# Altium PCB EP600_K_V1.2.3.PcbDoc
Units mm, origin at the board's own origin, x right, y up, seen from the top; angles counter-clockwise.
Board outline 130 x 24 mm, 2 copper layers (Top Layer, Bottom Layer); 22 components, 21 nets, 56 pads, 8 vias.
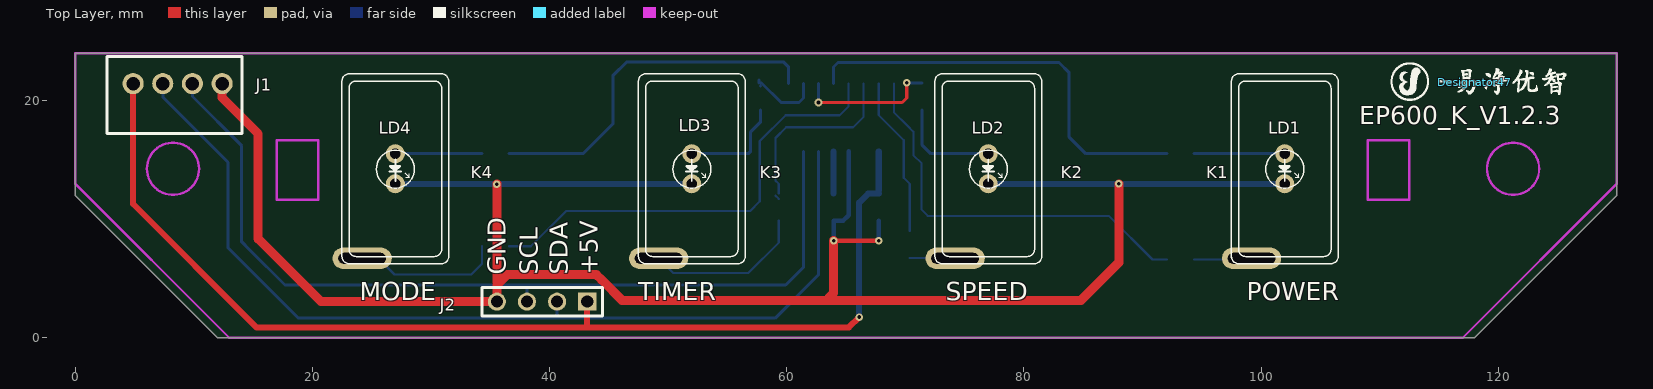
[diagram p0: Top Layer view]
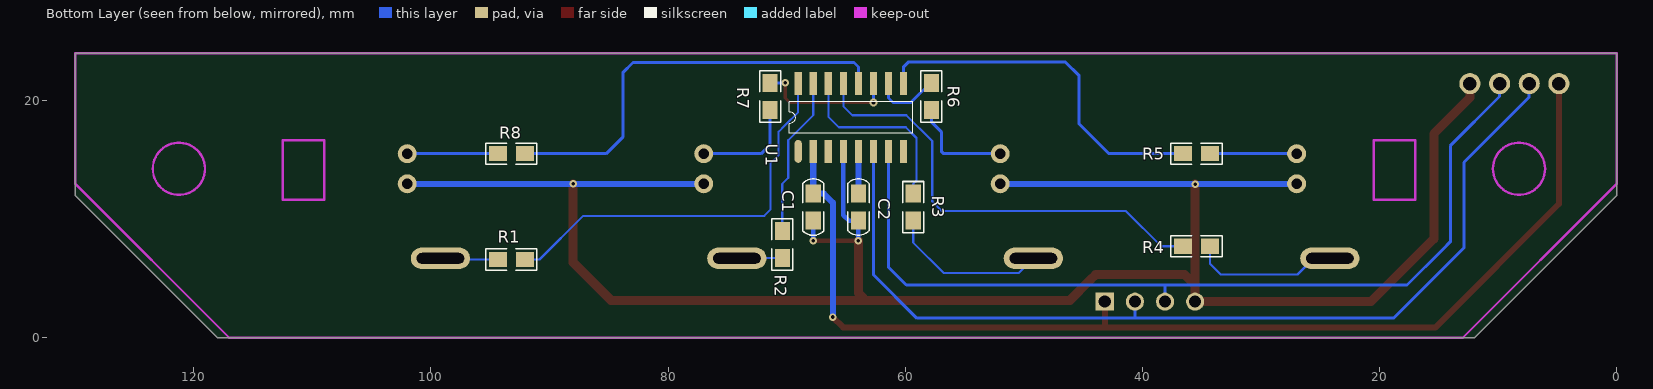
[diagram p1: Bottom Layer view, seen from below]

## Layer stack, top to bottom
Top Layer: signal copper 0.0356
Dielectric: dielectric 0.32, FR-4, Dk 4.8
Bottom Layer: signal copper 0.0356

## Board outline
12,0 0,12 0,24 130,24 130,12 118,0

## Design rules (kind name [scope] priority, off if disabled: settings)
Clearance [All] p1: gap=0.203
ComponentClearance [All] p1: gap=0.254 collisioncheckmode=3 verticalgap=0.254
HoleSize [All] p1: absolutevalues=TRUE maxlimit=2.54 minlimit=0.203 maxpercent=80.000 minpercent=20.000
PolygonConnect [All] p1: connectstyle=Relief reliefconductorwidth=0.254 reliefentries=4 polygonreliefangle="90 Angle"
RoutingVias [All] p1: holewidth=0.711 width=2.54 viastyle="Through Hole" minholewidth=0.305 minwidth=0.635 maxholewidth=1.27 maxwidth=1.27
SolderMaskExpansion [All] p1: expansion=0.102
TestPointUsage [All] p1: valid=0 allowmultiple=FALSE
Testpoint [All] p1: side=15 testpointundercomponent=TRUE minsize=1.016 maxsize=2.54 preferedsize=1.524 minholesize=0 maxholesize=1.016 preferedholesize=0.813 testpointgrid=0.025 style=1023 order=0-112345678
Width [All] p1: maxlimit=2.54 minlimit=0.152 preferedwidth=0.254 minimp=50.000000 maximp=50.000000 favimp=50.000000
17 further rules are at their usual default settings.

## Components (designator, comment, footprint, x,y, rotation, side; value= is the part's Value field where it differs from the comment)
C1 "224" 0805_C 67.761,12.161 r270 bottom
C2 "104" 0805_C 63.951,9.875 r90 bottom
Designator47 "Comment" PIC_AIRFACTORY-1500 118.002,21.559 r0 top
J1 "CON4" YT2.54-4P 12.389,21.432 r0 top
J2 "CON4" SIP4 43.18,3.045 r180 top
K1 "KEY-1" KEY_1 102,14.25 r0 top locked
K2 "KEY-1" KEY_1 77,14.25 r0 top locked
K3 "KEY-1" KEY_1 52,14.25 r0 top locked
K4 "KEY-1" KEY_1 27,14.25 r0 top locked
LD1 "ON/OFF" LED1 102,14.25 r0 top locked
LD2 "SPEED" LED1 77,14.25 r0 top locked
LD3 "TIMER" LED1 52,14.25 r0 top locked
LD4 "MODE" LED1 27,14.25 r0 top locked
R1 "1K" 0805_R 94.361,6.601 r180 bottom
R2 "1K" 0805_R 70.371,6.728 r90 bottom
R3 "1K" 0805_R 59.328,9.875 r90 bottom
R4 "1K" 0805_R 34.309,7.716 r0 bottom
R5 "331" 0805_R 36.595,15.52 r180 bottom
R6 "331" 0805_R 57.804,21.489 r270 bottom
R7 "331" 0805_R 71.393,21.489 r270 bottom
R8 "331" 0805_R 92.075,15.52 r0 bottom
U1 "OB39A08T1" SOP16 69.031,15.717 r90 bottom

## Footprints (in the part's own frame and the unit in brackets; to place one, negate y for a bottom-side part, rotate by r counter-clockwise, add the part's x,y. Pads: shape width x height; smd on the part's side, far side on the other; paste and mask are expansions set on the pad)
0805_C [mil]
  rect 60x50 smd: 1(0,0) 2(90,0)
  silkscreen extent -48,-35 139,35
0805_R [mil]
  rect 60x50 smd: 1(0,0) 2(90,0)
  silkscreen extent -40,-35 130,35
KEY_1 [mm]
  oval 5x1.8 hole 0.9 slot 4 at 0 deg: 1(-2.8,-7.55)
  silkscreen extent -4.5,-8 4.5,8
LED1 [mil]
  round 63 hole 35.43: A(0,50) K(0,-50)
  silkscreen extent -63,-64 63,62
PIC_AIRFACTORY-1500 [mm]
  silkscreen extent -7.06,-1.52 7.75,1.65
SIP4 [mil]
  rect 60x60 hole 40: 1(0,0)
  round 60 hole 40: 2(100,0) 3(200,0) 4(300,0)
  silkscreen extent -50,-47 350,47
SOP16 [mil]
  oval 76x24 smd: 1(0,0)
  rect 76x24 smd: 2(0,-50) 3(0,-100) 4(0,-150) 5(0,-200) 6(0,-250) 7(0,-300) 8(0,-350) 9(225,-350) 10(225,-300) 11(225,-250) 12(225,-200) 13(225,-150) 14(225,-100) 15(225,-50) 16(225,0)
  silkscreen extent 60,-380 165,30
YT2.54-4P [mil]
  round 70 hole 45: 1(0,0) 2(-98.43,0) 3(-196.85,0) 4(-295.28,0)
  silkscreen extent -382,-165 67,91

## Part data
C1 C2: library part CAP, "CAP"
J1: library part CON6, "Connector"
LD1 LD2 LD3 LD4: library part LED, "LED"
R1 R2 R3 R4 R5 R6 R7 R8: library part R0.25W, "RESISTOR"

## Via types
v1: diameter 0.635, hole 0.305, Top Layer to Bottom Layer, tented both sides, 8 vias

## Nets (pads, with @x,y where several pads share a name; then routed paths per layer and width w, separated by ;. In a path a pad name is that pad's centre, name@x,y a point inside that pad or via, vN(x,y) a via of type N, cw(c..) or ccw(c..) an arc to the next point about the centre after c; other vN are vias at no path point)
+5V: C1.1 J1.4 J2.1 U1.2 | length 93
  Top Layer w0.508: J1.4 4.889,11.279 15.282,0.886 65.249,0.886 v1(66.11,1.747) ; 43.18,0.956 J2.1
  Bottom Layer w0.508: v1(66.11,1.747) 66.11,11.399 66.872,12.161 C1.1 ; C1.1@67.761,12.415 U1.2
GND: C1.2 C2.1 J1.1 J2.4 LD1.K LD2.K LD3.K LD4.K U1.4 | length 177.2
  Top Layer w0.381: v1(63.951,8.182) v1(67.761,8.182)
  Top Layer w0.762: J1.1 12.389,20.25 15.437,17.202 15.437,8.351 20.743,3.045 J2.4 v1(35.56,12.951) ; 35.56,4.442 36.449,5.331 43.942,5.331 44.389,4.884 46.129,3.144 84.808,3.144 88.011,6.347 v1(88.011,12.98) ; 63.57,3.398 63.951,3.779 v1(63.951,8.182)
  Bottom Layer w0.381: v1(63.951,8.182) C2.1 64.751,9.875 65.221,10.345 U1.4 ; v1(67.761,8.182) C1.2
  Bottom Layer w0.508: LD4.K LD3.K ; LD2.K LD1.K
NetC2_2: C2.2 U1.5 | length 3.6
  Bottom Layer w0.508: C2.2 U1.5
NetK1_1: K1.1 R1.1 | length 4.7
  Bottom Layer w0.178: R1.1 K1.1@99.073,6.601
NetK2_1: K2.1 R2.1 | length 4.9
  Bottom Layer w0.178: R2.1 73.8,6.728 73.828,6.7 K2.1 K2.1@74.934,5.966
NetK3_1: K3.1 R3.1 | length 13.6
  Bottom Layer w0.178: K3.1 50.442,5.458 56.759,5.458 59.328,8.027 R3.1
NetK4_1: K4.1 R4.1 | length 12.5
  Bottom Layer w0.178: K4.1 25.555,6.7 26.924,5.331 33.401,5.331 34.309,6.239 R4.1
NetLD1_A: LD1.A R8.2 | length 7.6
  Bottom Layer w0.254: R8.2 LD1.A
NetLD2_A: LD2.A R7.2 | length 8.8
  Bottom Layer w0.254: R7.2 71.393,16.282 72.155,15.52 LD2.A
NetLD3_A: LD3.A R6.2 | length 8.9
  Bottom Layer w0.254: LD3.A 56.769,15.52 56.966,15.717 56.966,17.368 57.804,18.206 R6.2
NetLD4_A: LD4.A R5.2 | length 7.3
  Bottom Layer w0.254: LD4.A R5.2
NetR1_2: R1.2 U1.16 | length 34
  Bottom Layer w0.178: U1.16 69.031,19.025 70.2,17.856 70.682,17.374 70.682,15.397 71.378,14.701 71.378,10.801 71.895,10.284 87.164,10.284 90.847,6.601 R1.2
NetR2_2: R2.2 U1.15 | length 13.5
  Bottom Layer w0.178: U1.15 67.761,18.771 69.869,16.663 69.869,13.482 70.371,12.98 R2.2
NetR3_2: R3.2 U1.14 | length 16.2
  Bottom Layer w0.178: R3.2@59.055,11.983 R3.2@59.328,11.71 ; R3.2 59.328,12.974 59.055,13.247 59.055,16.841 59.963,17.749 65.602,17.749 66.491,18.638 U1.14
NetR4_2: R4.2 U1.13 | length 38.4
  Bottom Layer w0.178: R4.2 38.424,7.716 41.402,10.694 56.915,10.694 57.728,11.507 57.728,16.587 59.906,18.765 64.459,18.765 65.221,19.527 U1.13
NetR5_1: R5.1 U1.9 | length 30.7
  Bottom Layer w0.254: R5.1 42.828,15.52 45.339,18.031 45.339,22.095 46.482,23.238 59.76,23.238 60.141,22.857 U1.9
NetR6_1: R6.1 U1.10 | length 5.9
  Bottom Layer w0.254: R6.1@57.677,21.489 R6.1@57.677,21.743 ; R6.1@57.804,21.229 R6.1@57.804,21.235 ; R6.1 57.883,21.489 59.534,19.838 61.03,19.838 61.411,20.219 U1.10
NetR7_1: R7.1 U1.11 | length 11.7
  Top Layer w0.254: v1(62.681,19.838) 69.742,19.838 70.123,20.219 v1(70.123,21.489)
  Bottom Layer w0.254: v1(62.681,19.838) U1.11 ; v1(70.123,21.489) R7.1
NetR8_1: R8.1 U1.12 | length 36
  Bottom Layer w0.254: U1.12 63.951,22.829 64.332,23.21 82.959,23.21 83.82,22.349 83.82,16.917 85.217,15.52 R8.1
SCL: J1.2 J2.3 U1.7 | length 75.7
  Bottom Layer w0.254: J1.2 9.889,20.337 14.04,16.186 14.04,8.097 14.668,7.469 ; 14.668,7.469 17.695,4.442 59.915,4.442 61.411,5.938 U1.7 ; J2.3 38.1,4.372
SDA: J1.3 J2.2 U1.6 | length 81.7
  Bottom Layer w0.254: J1.3 7.389,20.297 12.897,14.789 12.897,7.589 18.838,1.648 59.026,1.648 62.681,5.303 U1.6 ; 40.583,1.648 40.64,1.705 J2.2
pads on no net: U1.1 U1.3 U1.8
copper on no net:
  other v1: 17,119

## Keep-outs
Keep-Out Layer:
  circle w0.203: c8.25,14.25 r2.2
  circle w0.203: c121.25,14.25 r2.2
  lines w0.203: 0,13 13,0 117,0 130,13 130,24 0,24 0,13 ; 17,11.65 17,16.65 20.5,16.65 20.5,11.65 17,11.65 ; 109,11.65 112.5,11.65 112.5,16.65 109,16.65 109,11.65

## Silkscreen, mask and mechanical layers (free items; w line width, h text height)
Top Overlay:
  text "EP600_K_V1.2.3" at 108.274,18.003 h1.52
  text "GND" at 36.322,5.331 h1.52 r90
  text "SCL" at 38.989,5.331 h1.52 r90
  text "SDA" at 41.529,5.331 h1.52 r90
  text "+5V" at 44.069,5.331 h1.52 r90
  text "MODE" at 24.003,3.172 h1.52
  text "TIMER" at 47.498,3.172 h1.52
  text "SPEED" at 73.406,3.172 h1.52
  text "POWER" at 98.806,3.172 h1.52
Mechanical 1:
  circle w0.203: c121.25,14.25 r2.2
  circle w0.203: c8.25,14.25 r2.2
  lines w0.203: 0,13 13,0 117,0 130,13 130,24 0,24 0,13 ; 17,11.65 17,16.65 20.5,16.65 20.5,11.65 17,11.65 ; 109,11.65 112.5,11.65 112.5,16.65 109,16.65 109,11.65